# Altium PCB N303-3V1.0.pcbdoc (part 2 of 3)
Units mm, origin at the board's own origin, x right, y up, seen from the top; angles counter-clockwise.
Board outline 100 x 100 mm, 2 copper layers (Top Layer, Bottom Layer); 92 components, 15 nets, 360 pads, 304 vias.
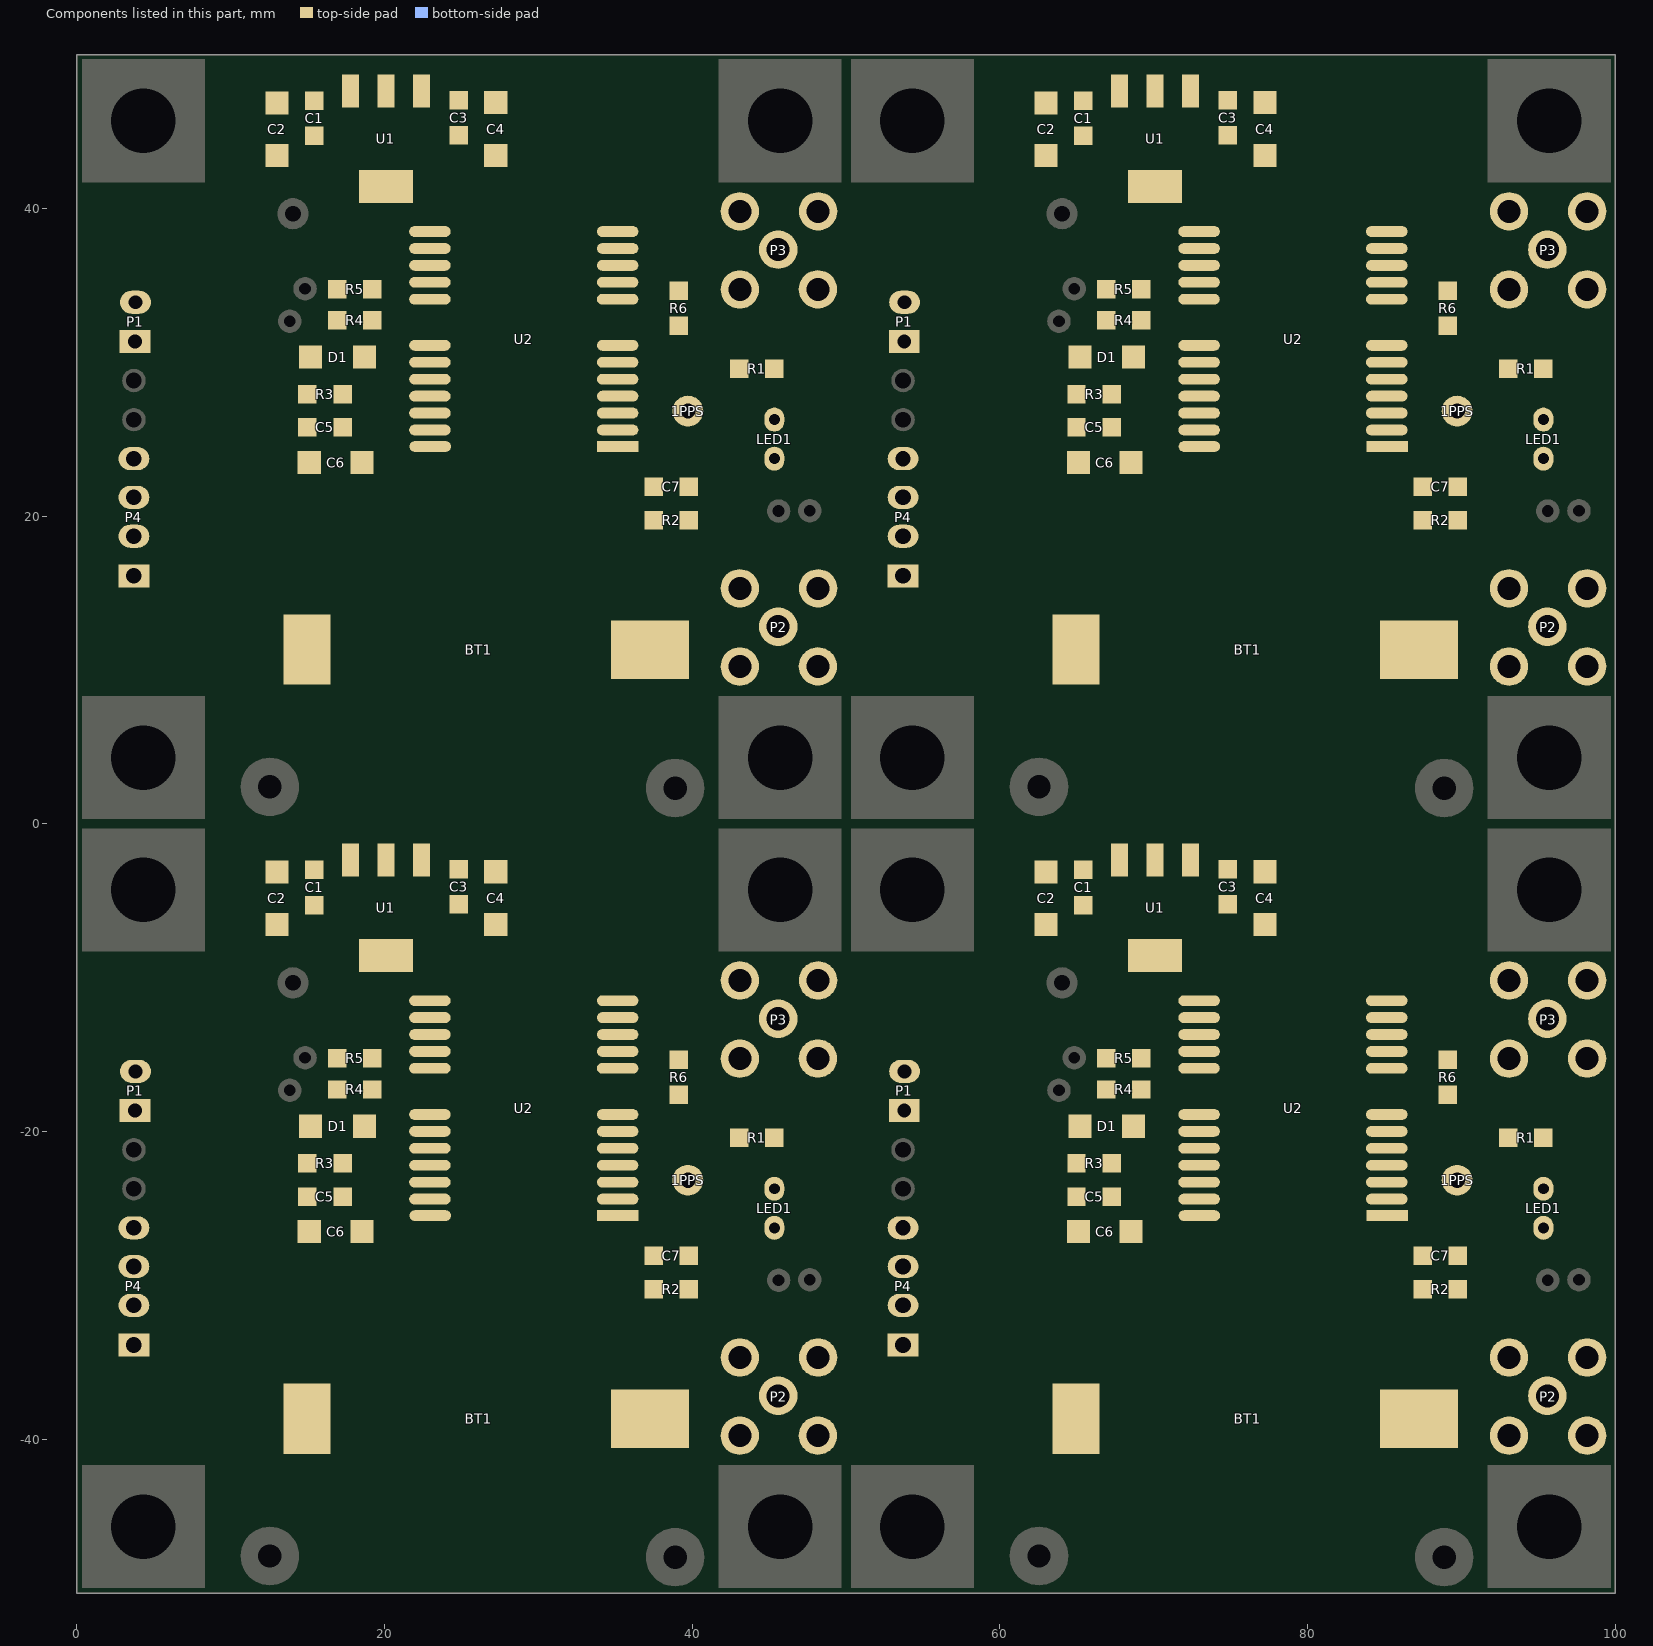
[diagram p2: the components of this part, seen from the top]

## Via types
v1: diameter 0.965, hole 0.457, Top Layer to Bottom Layer, 264 vias
v2: diameter 0.965, hole 0.635, Top Layer to Bottom Layer, 40 vias

## Nets (pads, with @x,y where several pads share a name; then routed paths per layer and width w, separated by ;. In a path a pad name is that pad's centre, name@x,y a point inside that pad or via, vN(x,y) a via of type N, cw(c..) or ccw(c..) an arc to the next point about the centre after c; other vN are vias at no path point) (continued)
copper on no net: | length 5164
  Top Layer w0.305: 14.986,-22.06 16.129,-20.917 17.43,-20.917 18.7,-19.647 ; 17.272,-22.06 18.161,-22.06 ; 19.202,-17.259 20.295,-18.352 20.295,-21.247 21.232,-22.184 22.954,-22.184 ; 19.215,-15.215 20.879,-16.878 20.879,-20.612 21.351,-21.084 22.954,-21.084 ; 22.954,-23.284 21.29,-23.284 ; 64.986,-22.06 66.129,-20.917 67.43,-20.917 68.7,-19.647 ; 64.986,27.94 66.129,29.083 67.43,29.083 68.7,30.353 ; 67.272,-22.06 68.161,-22.06 ; 67.272,27.94 68.161,27.94 ; 69.202,-17.259 70.295,-18.352 70.295,-21.247 71.232,-22.184 72.954,-22.184 ; 69.202,32.741 70.295,31.648 70.295,28.753 71.232,27.816 72.954,27.816 ; 69.215,-15.215 70.879,-16.878 70.879,-20.612 71.351,-21.084 72.954,-21.084 ; 69.215,34.785 70.879,33.122 70.879,29.388 71.351,28.916 72.954,28.916 ; 72.954,-23.284 71.29,-23.284 ; 72.954,26.716 71.29,26.716 ; 18.161,-22.06 19.385,-23.284 21.29,-23.284 ; 18.161,-22.06 20.066,-22.06 21.29,-23.284 ; 68.161,-22.06 69.385,-23.284 71.29,-23.284 ; 68.161,-22.06 70.066,-22.06 71.29,-23.284 ; 68.161,27.94 69.385,26.716 71.29,26.716 ; 68.161,27.94 70.066,27.94 71.29,26.716
  Top Layer w0.508: 5.512,-14.542 5.486,-14.567 ; 7.315,-15.735 7.264,-15.786 5.486,-15.786 ; 8.103,-14.948 8.001,-15.05 5.486,-15.05 ; 13.005,-6.546 13.005,-7.811 ; 15.418,-5.271 15.418,-7.099 ; 18.537,-26.505 20.904,-26.505 26.086,-31.687 38.329,-31.687 ; 21.793,-28.867 21.793,-32.449 ; 21.92,-28.766 25.629,-32.474 ; 22.974,-25.459 25.273,-25.459 ; 26.086,-25.464 26.081,-25.459 25.273,-25.459 ; 33.579,-10.122 33.299,-10.401 ; 35.15,-15.884 37.385,-15.884 39.116,-17.615 ; 35.154,-23.284 39.924,-23.284 40.005,-23.203 42.291,-23.203 45.339,-26.251 45.593,-26.505 45.593,-37.173 ; 35.154,-14.784 38.571,-14.784 39.116,-15.329 ; 35.154,-13.684 36.951,-13.684 ; 35.154,-12.584 45.515,-12.584 45.593,-12.662 ; 35.174,-25.459 36.825,-25.459 37.49,-26.124 37.49,-28.08 37.49,-30.239 ; v1@37.719,-11.544 37.659,-11.484 36.822,-11.484 ; 39.776,-28.08 39.776,-27.927 ; v2(41.529,-26.353) 41.529,-30.366 ; v2(41.554,-20.434) 41.58,-20.409 43.053,-20.409 ; 41.707,-32.677 40.894,-33.49 ; 42.189,-32.652 40.894,-33.947 ; 42.545,-10.401 33.299,-10.401 ; 45.339,-23.711 45.339,-20.409 ; 48.177,-15.246 48.171,-15.252 45.618,-15.252 ; 55.512,-14.542 55.486,-14.567 ; 55.512,35.458 55.486,35.433 ; 57.315,-15.735 57.264,-15.786 55.486,-15.786 ; 57.315,34.265 57.264,34.214 55.486,34.214 ; 58.103,-14.948 58.001,-15.05 55.486,-15.05 ; 58.103,35.052 58.001,34.95 55.486,34.95 ; 63.005,-6.546 63.005,-7.811 ; 63.005,43.454 63.005,42.189 ; 65.418,-5.271 65.418,-7.099 ; 65.418,44.729 65.418,42.901 ; 68.537,-26.505 70.904,-26.505 76.086,-31.687 88.329,-31.687 ; 68.537,23.495 70.904,23.495 76.086,18.313 88.329,18.313 ; 71.793,-28.867 71.793,-32.449 ; 71.793,21.133 71.793,17.551 ; 71.92,-28.766 75.629,-32.474 ; 71.92,21.234 75.629,17.526 ; 72.974,-25.459 75.273,-25.459 ; 72.974,24.541 75.273,24.541 ; 76.086,-25.464 76.081,-25.459 75.273,-25.459 ; 76.086,24.536 76.081,24.541 75.273,24.541 ; 83.579,-10.122 83.299,-10.401 ; 83.579,39.878 83.299,39.599 ; 85.15,-15.884 87.385,-15.884 89.116,-17.615 ; 85.15,34.116 87.385,34.116 89.116,32.385 ; 85.154,-23.284 89.924,-23.284 90.005,-23.203 92.291,-23.203 95.339,-26.251 95.593,-26.505 95.593,-37.173 ; 85.154,-14.784 88.571,-14.784 89.116,-15.329 ; 85.154,-13.684 86.951,-13.684 ; 85.154,-12.584 95.515,-12.584 95.593,-12.662 ; 85.154,26.716 89.924,26.716 90.005,26.797 92.291,26.797 95.339,23.749 95.593,23.495 95.593,12.827 ; 85.154,35.216 88.571,35.216 89.116,34.671 ; 85.154,36.316 86.951,36.316 ; 85.154,37.416 95.515,37.416 95.593,37.338 ; 85.174,-25.459 86.825,-25.459 87.49,-26.124 87.49,-28.08 87.49,-30.239 ; 85.174,24.541 86.825,24.541 87.49,23.876 87.49,21.92 87.49,19.761 ; v1@87.719,-11.544 87.659,-11.484 86.822,-11.484 ; v1@87.719,38.456 87.659,38.516 86.822,38.516 ; 89.776,-28.08 89.776,-27.927 ; 89.776,21.92 89.776,22.073 ; v2(91.529,-26.353) 91.529,-30.366 ; v2(91.529,23.647) 91.529,19.634 ; v2(91.554,-20.434) 91.58,-20.409 93.053,-20.409 ; v2(91.554,29.566) 91.58,29.591 93.053,29.591 ; 91.707,-32.677 90.894,-33.49 ; 91.707,17.323 90.894,16.51 ; 92.189,-32.652 90.894,-33.947 ; 92.189,17.348 90.894,16.053 ; 92.545,-10.401 83.299,-10.401 ; 92.545,39.599 83.299,39.599 ; 95.339,-23.711 95.339,-20.409 ; 95.339,26.289 95.339,29.591 ; 98.177,-15.246 98.171,-15.252 95.618,-15.252 ; 98.177,34.754 98.171,34.748 95.618,34.748 ; 1.651,-9.208 4.267,-9.208 ; 1.651,-9.208 2.134,-9.69 2.134,-14.542 ; 1.651,-9.208 0.648,-9.208 0.597,-9.258 0.597,-40.805 8.712,-40.805 9.296,-41.389 9.296,-48.882 9.804,-49.39 40.792,-49.39 ; 2.134,-16.04 2.174,-16.081 3.809,-16.081 ; 2.134,-16.04 2.134,-14.542 ; 2.134,-16.04 2.134,-26.251 2.134,-35.268 2.21,-35.344 11.938,-35.344 12.421,-35.827 12.421,-40.983 13.183,-41.745 17.094,-41.745 17.628,-41.212 17.628,-37.529 21.793,-33.363 21.793,-32.449 ; 2.134,-14.542 2.27,-14.542 3.809,-16.081 ; 3.809,-16.081 3.972,-16.081 ; 3.809,-16.081 3.809,-9.666 4.216,-9.258 ; 3.972,-16.081 5.486,-14.567 ; 3.972,-16.081 5.486,-16.081 ; 4.216,-9.258 4.267,-9.208 ; 4.216,-9.258 8.458,-9.258 8.509,-9.208 ; 4.267,-9.208 8.509,-9.208 ; 5.486,-16.081 7.351,-16.081 7.887,-15.545 ; 5.486,-16.081 5.486,-15.786 ; 5.486,-15.786 5.486,-15.431 ; 5.486,-15.431 7.772,-15.431 7.887,-15.545 ; 5.486,-15.431 5.486,-15.05 ; 5.486,-15.05 5.486,-14.567 ; 7.887,-15.545 9.906,-13.526 9.906,-2.756 12.065,-0.597 ; 8.509,-9.208 9.144,-8.573 9.144,-1.257 9.804,-0.597 12.065,-0.597 ; 12.065,-0.597 29.083,-0.597 ; 13.005,-7.811 12.573,-7.811 12.344,-8.039 12.344,-12.992 12.827,-13.475 13.691,-13.475 ; 13.005,-7.811 14.707,-7.811 ; 13.005,-7.811 13.005,-12.789 13.691,-13.475 ; 13.691,-13.475 19.177,-13.475 21.167,-11.484 ; 14.707,-7.811 15.418,-7.099 ; 14.707,-7.811 15.443,-7.811 ; 15.418,-7.099 16.104,-7.785 ; 15.418,-7.099 15.418,-7.785 15.443,-7.811 ; 15.443,-7.811 16.078,-7.811 16.104,-7.785 ; 16.104,-7.785 16.104,-9.843 16.561,-10.3 21.234,-10.3 ; 21.167,-11.484 22.954,-11.484 25.273,-11.484 ; 21.167,-11.484 21.167,-10.367 21.234,-10.3 ; 21.234,-10.3 23.876,-10.3 ; 21.793,-32.449 21.819,-32.474 25.629,-32.474 ; 23.876,-10.3 24.003,-10.173 24.003,-8.319 24.257,-8.065 28.575,-8.065 28.981,-7.658 ; 23.876,-10.3 25.273,-10.3 ; 25.273,-25.459 25.273,-29.35 25.349,-29.426 32.842,-29.426 32.944,-29.324 32.944,-11.484 ; 25.273,-25.459 25.273,-11.484 ; 25.273,-11.484 25.273,-10.3 ; 25.273,-11.484 25.527,-11.484 ; 25.273,-10.3 25.502,-10.3 ; 25.502,-10.3 25.502,-11.459 25.527,-11.484 ; 25.502,-10.3 27.737,-10.3 28.981,-9.055 28.981,-7.658 ; 25.527,-11.484 32.766,-11.484 ; 25.629,-32.474 25.654,-32.449 40.894,-32.449 ; 28.981,-7.658 28.981,-0.699 29.083,-0.597 ; 29.083,-0.597 40.386,-0.597 40.869,-1.08 40.869,-8.954 ; 32.766,-11.484 32.766,-10.757 33.122,-10.401 33.299,-10.401 ; 32.766,-11.484 32.944,-11.484 ; 32.944,-11.484 32.944,-10.757 33.299,-10.401 ; 32.944,-11.484 35.154,-11.484 36.822,-11.484 ; 34.036,-38.697 37.236,-38.697 37.262,-38.672 ; 34.036,-38.697 34.036,-40.983 34.366,-41.313 37.313,-41.313 ; 34.036,-38.697 34.036,-36.132 34.29,-35.878 37.262,-35.878 ; 36.822,-11.484 37.16,-11.822 42.977,-11.822 ; 36.951,-13.684 37.289,-13.346 43.002,-13.346 ; 36.951,-13.684 37.076,-13.684 ; 37.076,-13.684 37.414,-14.022 38.568,-14.022 38.583,-14.008 40.183,-14.008 40.462,-14.288 40.462,-18.682 40.843,-19.063 46.355,-19.063 46.965,-19.672 46.965,-31.738 48.183,-32.957 ; 37.076,-13.684 41.377,-13.684 ; 37.262,-38.672 40.818,-38.672 40.894,-38.595 ; 37.262,-38.672 37.262,-41.262 37.313,-41.313 ; 37.262,-38.672 37.262,-35.878 ; 37.262,-35.878 40.894,-35.878 ; 37.313,-41.313 40.792,-41.313 ; 38.329,-31.687 39.776,-30.239 ; 38.329,-31.687 39.802,-31.687 ; 39.776,-30.239 41.402,-30.239 41.529,-30.366 ; 39.776,-30.239 39.776,-31.661 39.802,-31.687 ; 39.776,-27.927 40.538,-27.165 40.538,-25.942 41.119,-25.362 42.113,-25.362 42.596,-25.845 42.596,-30.747 40.894,-32.449 ; 39.776,-27.927 39.776,-27.191 37.313,-24.727 37.313,-24.143 38.405,-24.143 39.065,-24.803 40.538,-24.803 41.224,-24.117 41.935,-24.117 43.993,-26.175 43.993,-26.861 44.272,-27.14 44.272,-33.514 43.103,-34.683 43.103,-37.503 ; 39.802,-31.687 40.208,-31.687 41.529,-30.366 ; 40.792,-49.39 40.894,-49.289 40.894,-41.212 ; 40.792,-49.39 41.084,-49.39 41.097,-49.403 41.183,-49.317 41.183,-41.212 ; 40.792,-49.39 40.792,-41.313 ; 40.792,-41.313 40.894,-41.212 ; 40.792,-41.313 40.792,-41.212 ; 40.792,-41.212 40.894,-41.212 ; 40.792,-41.212 40.894,-41.11 ; 40.869,-8.954 41.034,-8.788 49.403,-8.788 49.403,-17.056 ; 40.869,-8.954 40.869,-9.462 41.579,-10.172 43.103,-10.172 ; 40.894,-41.212 40.894,-41.11 ; 40.894,-41.212 41.183,-41.212 ; 40.894,-41.11 40.894,-40.285 ; 40.894,-41.11 41.307,-40.697 ; 40.894,-40.285 41.307,-40.697 ; 40.894,-40.285 40.894,-38.595 ; 40.894,-38.595 40.894,-37.402 ; 40.894,-37.402 43.001,-37.402 43.103,-37.503 ; 40.894,-37.402 40.894,-35.878 ; 40.894,-35.878 40.894,-33.947 ; 40.894,-33.947 40.894,-33.49 ; 40.894,-33.49 40.894,-32.449 ; 41.183,-41.212 41.472,-41.212 41.51,-41.174 41.783,-41.174 ; 41.307,-40.697 41.783,-41.174 ; 41.307,-40.697 42.241,-39.763 43.103,-39.763 ; 41.377,-13.684 41.25,-13.811 41.25,-16.548 41.783,-17.082 45.72,-17.082 ; 41.377,-13.684 42.996,-13.684 43.002,-13.678 ; 41.783,-41.174 49.263,-41.174 49.403,-41.034 49.403,-17.056 ; 42.977,-11.822 42.977,-10.298 43.103,-10.172 ; 42.977,-11.822 43.867,-11.822 44.856,-10.833 45.695,-10.833 ; 43.002,-13.678 43.002,-15.151 43.103,-15.252 45.618,-15.252 ; 43.002,-13.678 43.002,-13.346 ; 43.002,-13.346 43.791,-13.346 44.865,-14.42 45.669,-14.42 ; 43.103,-39.763 48.171,-39.763 48.177,-39.757 48.183,-39.751 48.183,-34.683 48.183,-32.957 ; 43.103,-39.763 43.103,-37.503 ; 43.103,-10.172 45.669,-10.172 ; 45.618,-15.252 45.669,-15.201 45.669,-14.42 ; 45.618,-15.252 45.618,-16.98 45.72,-17.082 ; 45.669,-14.42 46.35,-14.42 47.371,-13.399 47.371,-12.535 ; 45.669,-10.172 45.695,-10.197 45.695,-10.833 ; 45.669,-10.172 48.183,-10.172 48.183,-12.586 ; 45.695,-10.833 46.533,-10.833 47.371,-11.671 47.371,-12.535 ; 45.72,-17.082 48.183,-17.082 ; 47.371,-12.535 48.132,-12.535 48.183,-12.586 ; 48.183,-32.957 48.183,-17.082 ; 48.183,-17.082 49.378,-17.082 49.403,-17.056 ; 48.183,-17.082 48.183,-12.586 ; 51.651,-9.208 54.267,-9.208 ; 51.651,-9.208 52.134,-9.69 52.134,-14.542 ; 51.651,-9.208 50.648,-9.208 50.597,-9.258 50.597,-40.805 58.712,-40.805 59.296,-41.389 59.296,-48.882 59.804,-49.39 90.792,-49.39 ; 51.651,40.792 54.267,40.792 ; 51.651,40.792 52.134,40.31 52.134,35.458 ; 51.651,40.792 50.648,40.792 50.597,40.742 50.597,9.195 58.712,9.195 59.296,8.611 59.296,1.118 59.804,0.61 90.792,0.61 ; 52.134,-16.04 52.174,-16.081 53.809,-16.081 ; 52.134,-16.04 52.134,-14.542 ; 52.134,-16.04 52.134,-26.251 52.134,-35.268 52.21,-35.344 61.938,-35.344 62.421,-35.827 62.421,-40.983 63.183,-41.745 67.094,-41.745 67.628,-41.212 67.628,-37.529 71.793,-33.363 71.793,-32.449 ; 52.134,-14.542 52.27,-14.542 53.809,-16.081 ; 52.134,33.96 52.174,33.919 53.809,33.919 ; 52.134,33.96 52.134,35.458 ; 52.134,33.96 52.134,23.749 52.134,14.732 52.21,14.656 61.938,14.656 62.421,14.173 62.421,9.017 63.183,8.255 67.094,8.255 67.628,8.788 67.628,12.471 71.793,16.637 71.793,17.551 ; 52.134,35.458 52.27,35.458 53.809,33.919 ; 53.809,-16.081 53.972,-16.081 ; 53.809,-16.081 53.809,-9.666 54.216,-9.258 ; 53.809,33.919 53.972,33.919 ; 53.809,33.919 53.809,40.334 54.216,40.742 ; 53.972,-16.081 55.486,-14.567 ; 53.972,-16.081 55.486,-16.081 ; 53.972,33.919 55.486,35.433 ; 53.972,33.919 55.486,33.919 ; 54.216,-9.258 54.267,-9.208 ; 54.216,-9.258 58.458,-9.258 58.509,-9.208 ; 54.216,40.742 54.267,40.792 ; 54.216,40.742 58.458,40.742 58.509,40.792 ; 54.267,-9.208 58.509,-9.208 ; 54.267,40.792 58.509,40.792 ; 55.486,-16.081 57.351,-16.081 57.887,-15.545 ; 55.486,-16.081 55.486,-15.786 ; 55.486,-15.786 55.486,-15.431 ; 55.486,-15.431 57.772,-15.431 57.887,-15.545 ; 55.486,-15.431 55.486,-15.05 ; 55.486,-15.05 55.486,-14.567 ; 55.486,33.919 57.351,33.919 57.887,34.455 ; 55.486,33.919 55.486,34.214 ; 55.486,34.214 55.486,34.569 ; 55.486,34.569 57.772,34.569 57.887,34.455 ; 55.486,34.569 55.486,34.95 ; 55.486,34.95 55.486,35.433 ; 57.887,-15.545 59.906,-13.526 59.906,-2.756 62.065,-0.597 ; 57.887,34.455 59.906,36.474 59.906,47.244 62.065,49.403 ; 58.509,-9.208 59.144,-8.573 59.144,-1.257 59.804,-0.597 62.065,-0.597 ; 58.509,40.792 59.144,41.427 59.144,48.743 59.804,49.403 62.065,49.403 ; 62.065,-0.597 79.083,-0.597 ; 62.065,49.403 79.083,49.403 ; 63.005,-7.811 62.573,-7.811 62.344,-8.039 62.344,-12.992 62.827,-13.475 63.691,-13.475 ; 63.005,-7.811 64.707,-7.811 ; 63.005,-7.811 63.005,-12.789 63.691,-13.475 ; 63.005,42.189 62.573,42.189 62.344,41.961 62.344,37.008 62.827,36.525 63.691,36.525 ; 63.005,42.189 64.707,42.189 ; 63.005,42.189 63.005,37.211 63.691,36.525 ; 63.691,-13.475 69.177,-13.475 71.167,-11.484 ; 63.691,36.525 69.177,36.525 71.167,38.516 ; 64.707,-7.811 65.418,-7.099 ; 64.707,-7.811 65.443,-7.811 ; 64.707,42.189 65.418,42.901 ; 64.707,42.189 65.443,42.189 ; 65.418,-7.099 66.104,-7.785 ; 65.418,-7.099 65.418,-7.785 65.443,-7.811 ; 65.418,42.901 66.104,42.215 ; 65.418,42.901 65.418,42.215 65.443,42.189 ; 65.443,-7.811 66.078,-7.811 66.104,-7.785 ; 65.443,42.189 66.078,42.189 66.104,42.215 ; 66.104,-7.785 66.104,-9.843 66.561,-10.3 71.234,-10.3 ; 66.104,42.215 66.104,40.157 66.561,39.7 71.234,39.7 ; 71.167,-11.484 72.954,-11.484 75.273,-11.484 ; 71.167,-11.484 71.167,-10.367 71.234,-10.3 ; 71.167,38.516 72.954,38.516 75.273,38.516 ; 71.167,38.516 71.167,39.633 71.234,39.7 ; 71.234,-10.3 73.876,-10.3 ; 71.234,39.7 73.876,39.7 ; 71.793,-32.449 71.819,-32.474 75.629,-32.474 ; 71.793,17.551 71.819,17.526 75.629,17.526 ; 73.876,-10.3 74.003,-10.173 74.003,-8.319 74.257,-8.065 78.575,-8.065 78.981,-7.658 ; 73.876,-10.3 75.273,-10.3 ; 73.876,39.7 74.003,39.827 74.003,41.681 74.257,41.935 78.575,41.935 78.981,42.342 ; 73.876,39.7 75.273,39.7 ; 75.273,-25.459 75.273,-29.35 75.349,-29.426 82.842,-29.426 82.944,-29.324 82.944,-11.484 ; 75.273,-25.459 75.273,-11.484 ; 75.273,-11.484 75.273,-10.3 ; 75.273,-11.484 75.527,-11.484 ; 75.273,-10.3 75.502,-10.3 ; 75.273,24.541 75.273,20.65 75.349,20.574 82.842,20.574 82.944,20.676 82.944,38.516 ; 75.273,24.541 75.273,38.516 ; 75.273,38.516 75.273,39.7 ; 75.273,38.516 75.527,38.516 ; 75.273,39.7 75.502,39.7 ; 75.502,-10.3 75.502,-11.459 75.527,-11.484 ; 75.502,-10.3 77.737,-10.3 78.981,-9.055 78.981,-7.658 ; 75.502,39.7 75.502,38.541 75.527,38.516 ; 75.502,39.7 77.737,39.7 78.981,40.945 78.981,42.342 ; 75.527,-11.484 82.766,-11.484 ; 75.527,38.516 82.766,38.516 ; 75.629,-32.474 75.654,-32.449 90.894,-32.449 ; 75.629,17.526 75.654,17.551 90.894,17.551 ; 78.981,-7.658 78.981,-0.699 79.083,-0.597 ; 78.981,42.342 78.981,49.301 79.083,49.403 ; 79.083,-0.597 90.386,-0.597 90.869,-1.08 90.869,-8.954 ; 79.083,49.403 90.386,49.403 90.869,48.92 90.869,41.046 ; 82.766,-11.484 82.766,-10.757 83.122,-10.401 83.299,-10.401 ; 82.766,-11.484 82.944,-11.484 ; 82.766,38.516 82.766,39.243 83.122,39.599 83.299,39.599 ; 82.766,38.516 82.944,38.516 ; 82.944,-11.484 82.944,-10.757 83.299,-10.401 ; 82.944,-11.484 85.154,-11.484 86.822,-11.484 ; 82.944,38.516 82.944,39.243 83.299,39.599 ; 82.944,38.516 85.154,38.516 86.822,38.516 ; 84.036,-38.697 87.236,-38.697 87.262,-38.672 ; 84.036,-38.697 84.036,-40.983 84.366,-41.313 87.313,-41.313 ; 84.036,-38.697 84.036,-36.132 84.29,-35.878 87.262,-35.878 ; 84.036,11.303 87.236,11.303 87.262,11.328 ; 84.036,11.303 84.036,9.017 84.366,8.687 87.313,8.687 ; 84.036,11.303 84.036,13.868 84.29,14.122 87.262,14.122 ; 86.822,-11.484 87.16,-11.822 92.977,-11.822 ; 86.822,38.516 87.16,38.178 92.977,38.178 ; 86.951,-13.684 87.289,-13.346 93.002,-13.346 ; 86.951,-13.684 87.076,-13.684 ; 86.951,36.316 87.289,36.654 93.002,36.654 ; 86.951,36.316 87.076,36.316 ; 87.076,-13.684 87.414,-14.022 88.568,-14.022 88.583,-14.008 90.183,-14.008 90.462,-14.288 90.462,-18.682 90.843,-19.063 96.355,-19.063 96.965,-19.672 96.965,-31.738 98.183,-32.957 ; 87.076,-13.684 91.377,-13.684 ; 87.076,36.316 87.414,35.978 88.568,35.978 88.583,35.992 90.183,35.992 90.462,35.712 90.462,31.318 90.843,30.937 96.355,30.937 96.965,30.328 96.965,18.262 98.183,17.043 ; 87.076,36.316 91.377,36.316 ; 87.262,-38.672 90.818,-38.672 90.894,-38.595 ; 87.262,-38.672 87.262,-41.262 87.313,-41.313 ; 87.262,-38.672 87.262,-35.878 ; 87.262,-35.878 90.894,-35.878 ; 87.262,11.328 90.818,11.328 90.894,11.405 ; 87.262,11.328 87.262,8.738 87.313,8.687 ; 87.262,11.328 87.262,14.122 ; 87.262,14.122 90.894,14.122 ; 87.313,-41.313 90.792,-41.313 ; 87.313,8.687 90.792,8.687 ; 88.329,-31.687 89.776,-30.239 ; 88.329,-31.687 89.802,-31.687 ; 88.329,18.313 89.776,19.761 ; 88.329,18.313 89.802,18.313 ; 89.776,-30.239 91.402,-30.239 91.529,-30.366 ; 89.776,-30.239 89.776,-31.661 89.802,-31.687 ; 89.776,-27.927 90.538,-27.165 90.538,-25.942 91.119,-25.362 92.113,-25.362 92.596,-25.845 92.596,-30.747 90.894,-32.449 ; 89.776,-27.927 89.776,-27.191 87.313,-24.727 87.313,-24.143 88.405,-24.143 89.065,-24.803 90.538,-24.803 91.224,-24.117 91.935,-24.117 93.993,-26.175 93.993,-26.861 94.272,-27.14 94.272,-33.514 93.103,-34.683 93.103,-37.503 ; 89.776,19.761 91.402,19.761 91.529,19.634 ; 89.776,19.761 89.776,18.339 89.802,18.313 ; 89.776,22.073 90.538,22.835 90.538,24.058 91.119,24.638 92.113,24.638 92.596,24.155 92.596,19.253 90.894,17.551 ; 89.776,22.073 89.776,22.809 87.313,25.273 87.313,25.857 88.405,25.857 89.065,25.197 90.538,25.197 91.224,25.883 91.935,25.883 93.993,23.825 93.993,23.139 94.272,22.86 94.272,16.486 93.103,15.317 93.103,12.497 ; 89.802,-31.687 90.208,-31.687 91.529,-30.366 ; 89.802,18.313 90.208,18.313 91.529,19.634 ; 90.792,-49.39 90.894,-49.289 90.894,-41.212 ; 90.792,-49.39 91.084,-49.39 91.097,-49.403 91.183,-49.317 91.183,-41.212 ; 90.792,-49.39 90.792,-41.313 ; 90.792,-41.313 90.894,-41.212 ; 90.792,-41.313 90.792,-41.212 ; 90.792,-41.212 90.894,-41.212 ; 90.792,-41.212 90.894,-41.11 ; 90.792,0.61 90.894,0.711 90.894,8.788 ; 90.792,0.61 91.084,0.61 91.097,0.597 91.183,0.683 91.183,8.788 ; 90.792,0.61 90.792,8.687 ; 90.792,8.687 90.894,8.788 ; 90.792,8.687 90.792,8.788 ; 90.792,8.788 90.894,8.788 ; 90.792,8.788 90.894,8.89 ; 90.869,-8.954 91.034,-8.788 99.403,-8.788 99.403,-17.056 ; 90.869,-8.954 90.869,-9.462 91.579,-10.172 93.103,-10.172 ; 90.869,41.046 91.034,41.212 99.403,41.212 99.403,32.944 ; 90.869,41.046 90.869,40.538 91.579,39.828 93.103,39.828 ; 90.894,-41.212 90.894,-41.11 ; 90.894,-41.212 91.183,-41.212 ; 90.894,-41.11 90.894,-40.285 ; 90.894,-41.11 91.307,-40.697 ; 90.894,-40.285 91.307,-40.697 ; 90.894,-40.285 90.894,-38.595 ; 90.894,-38.595 90.894,-37.402 ; 90.894,-37.402 93.001,-37.402 93.103,-37.503 ; 90.894,-37.402 90.894,-35.878 ; 90.894,-35.878 90.894,-33.947 ; 90.894,-33.947 90.894,-33.49 ; 90.894,-33.49 90.894,-32.449 ; 90.894,8.788 90.894,8.89 ; 90.894,8.788 91.183,8.788 ; 90.894,8.89 90.894,9.715 ; 90.894,8.89 91.307,9.303 ; 90.894,9.715 91.307,9.303 ; 90.894,9.715 90.894,11.405 ; 90.894,11.405 90.894,12.598 ; 90.894,12.598 93.001,12.598 93.103,12.497 ; 90.894,12.598 90.894,14.122 ; 90.894,14.122 90.894,16.053 ; 90.894,16.053 90.894,16.51 ; 90.894,16.51 90.894,17.551 ; 91.183,-41.212 91.472,-41.212 91.51,-41.174 91.783,-41.174 ; 91.183,8.788 91.472,8.788 91.51,8.826 91.783,8.826 ; 91.307,-40.697 91.783,-41.174 ; 91.307,-40.697 92.241,-39.763 93.103,-39.763 ; 91.307,9.303 91.783,8.826 ; 91.307,9.303 92.241,10.237 93.103,10.237 ; 91.377,-13.684 91.25,-13.811 91.25,-16.548 91.783,-17.082 95.72,-17.082 ; 91.377,-13.684 92.996,-13.684 93.002,-13.678 ; 91.377,36.316 91.25,36.189 91.25,33.452 91.783,32.918 95.72,32.918 ; 91.377,36.316 92.996,36.316 93.002,36.322 ; 91.783,-41.174 99.263,-41.174 99.403,-41.034 99.403,-17.056 ; 91.783,8.826 99.263,8.826 99.403,8.966 99.403,32.944 ; 92.977,-11.822 92.977,-10.298 93.103,-10.172 ; 92.977,-11.822 93.867,-11.822 94.856,-10.833 95.695,-10.833 ; 92.977,38.178 92.977,39.702 93.103,39.828 ; 92.977,38.178 93.867,38.178 94.856,39.167 95.695,39.167 ; 93.002,-13.678 93.002,-15.151 93.103,-15.252 95.618,-15.252 ; 93.002,-13.678 93.002,-13.346 ; 93.002,-13.346 93.791,-13.346 94.865,-14.42 95.669,-14.42 ; 93.002,36.322 93.002,34.849 93.103,34.748 95.618,34.748 ; 93.002,36.322 93.002,36.654 ; 93.002,36.654 93.791,36.654 94.865,35.58 95.669,35.58 ; 93.103,-39.763 98.171,-39.763 98.177,-39.757 98.183,-39.751 98.183,-34.683 98.183,-32.957 ; 93.103,-39.763 93.103,-37.503 ; 93.103,-10.172 95.669,-10.172 ; 93.103,10.237 98.171,10.237 98.177,10.243 98.183,10.249 98.183,15.317 98.183,17.043 ; 93.103,10.237 93.103,12.497 ; 93.103,39.828 95.669,39.828 ; 95.618,-15.252 95.669,-15.201 95.669,-14.42 ; 95.618,-15.252 95.618,-16.98 95.72,-17.082 ; 95.618,34.748 95.669,34.799 95.669,35.58 ; 95.618,34.748 95.618,33.02 95.72,32.918 ; 95.669,-14.42 96.35,-14.42 97.371,-13.399 97.371,-12.535 ; 95.669,-10.172 95.695,-10.197 95.695,-10.833 ; 95.669,-10.172 98.183,-10.172 98.183,-12.586 ; 95.669,35.58 96.35,35.58 97.371,36.601 97.371,37.465 ; 95.669,39.828 95.695,39.803 95.695,39.167 ; 95.669,39.828 98.183,39.828 98.183,37.414 ; 95.695,-10.833 96.533,-10.833 97.371,-11.671 97.371,-12.535 ; 95.695,39.167 96.533,39.167 97.371,38.329 97.371,37.465 ; 95.72,-17.082 98.183,-17.082 ; 95.72,32.918 98.183,32.918 ; 97.371,-12.535 98.132,-12.535 98.183,-12.586 ; 97.371,37.465 98.132,37.465 98.183,37.414 ; 98.183,-32.957 98.183,-17.082 ; 98.183,-17.082 99.378,-17.082 99.403,-17.056 ; 98.183,-17.082 98.183,-12.586 ; 98.183,17.043 98.183,32.918 ; 98.183,32.918 99.378,32.918 99.403,32.944 ; 98.183,32.918 98.183,37.414
  Top Layer w0.635: 3.708,-31.291 9.209,-31.291 11.1,-29.401 11.1,-20.13 ; 3.708,-28.766 8.128,-28.766 9.703,-27.191 9.703,-18.682 ; 12.598,-33.668 12.598,-20.841 13.792,-19.647 15.2,-19.647 ; 13.132,-14.542 13.081,-14.542 9.703,-17.92 9.703,-18.682 ; 13.157,-16.828 13.157,-16.904 11.1,-18.961 11.1,-19.545 ; 13.259,-17.971 11.1,-20.13 ; 13.64,-17.234 15.024,-17.234 ; 14.122,-17.285 13.36,-17.285 11.1,-19.545 ; 14.986,-24.219 14.986,-26.383 15.108,-26.505 ; 15.926,-17.234 15.024,-17.234 ; 16.916,-17.234 15.024,-17.234 ; 16.916,-15.202 14.834,-15.202 13.183,-15.202 9.703,-18.682 ; 17.272,-24.219 17.437,-24.384 18.567,-24.384 ; 18.537,-26.505 18.537,-24.415 18.567,-24.384 ; 22.954,-24.384 18.567,-24.384 ; 53.708,-31.291 59.209,-31.291 61.1,-29.401 61.1,-20.13 ; 53.708,-28.766 58.128,-28.766 59.703,-27.191 59.703,-18.682 ; 53.708,18.709 59.209,18.709 61.1,20.599 61.1,29.87 ; 53.708,21.234 58.128,21.234 59.703,22.809 59.703,31.318 ; 62.598,-33.668 62.598,-20.841 63.792,-19.647 65.2,-19.647 ; 62.598,16.332 62.598,29.159 63.792,30.353 65.2,30.353 ; 63.132,-14.542 63.081,-14.542 59.703,-17.92 59.703,-18.682 ; 63.132,35.458 63.081,35.458 59.703,32.08 59.703,31.318 ; 63.157,-16.828 63.157,-16.904 61.1,-18.961 61.1,-19.545 ; 63.157,33.172 63.157,33.096 61.1,31.039 61.1,30.455 ; 63.259,-17.971 61.1,-20.13 ; 63.259,32.029 61.1,29.87 ; 63.64,-17.234 65.024,-17.234 ; 63.64,32.766 65.024,32.766 ; 64.122,-17.285 63.36,-17.285 61.1,-19.545 ; 64.122,32.715 63.36,32.715 61.1,30.455 ; 64.986,-24.219 64.986,-26.383 65.108,-26.505 ; 64.986,25.781 64.986,23.617 65.108,23.495 ; 65.926,-17.234 65.024,-17.234 ; 65.926,32.766 65.024,32.766 ; 66.916,-17.234 65.024,-17.234 ; 66.916,-15.202 64.834,-15.202 63.183,-15.202 59.703,-18.682 ; 66.916,32.766 65.024,32.766 ; 66.916,34.798 64.834,34.798 63.183,34.798 59.703,31.318 ; 67.272,-24.219 67.437,-24.384 68.567,-24.384 ; 67.272,25.781 67.437,25.616 68.567,25.616 ; 68.537,-26.505 68.537,-24.415 68.567,-24.384 ; 68.537,23.495 68.537,25.585 68.567,25.616 ; 72.954,-24.384 68.567,-24.384 ; 72.954,25.616 68.567,25.616 ; 11.1,-20.13 11.1,-19.545 ; 61.1,-20.13 61.1,-19.545 ; 61.1,29.87 61.1,30.455
  Top Layer w1.016: 22.377,-0.851 22.391,-0.865 22.391,-2.348 26.471,-2.348 27.229,-3.107 27.229,-0.876 27.254,-0.851 ; v2@24.79,-6.536 24.816,-6.51 24.816,-5.23 ; 72.377,-0.851 72.391,-0.865 72.391,-2.348 76.471,-2.348 77.229,-3.107 77.229,-0.876 77.254,-0.851 ; 72.377,49.149 72.391,49.135 72.391,47.652 76.471,47.652 77.229,46.893 77.229,49.124 77.254,49.149 ; v2@74.79,-6.536 74.816,-6.51 74.816,-5.23 ; v2@74.79,43.464 74.816,43.49 74.816,44.77
  Top Layer w1.143: 0.914,-26.251 2.134,-26.251 3.708,-26.251 7.645,-26.251 8.382,-25.514 8.382,-19.393 7.341,-20.434 5.944,-20.434 5.563,-20.815 5.563,-25.997 5.385,-26.175 ; 14.964,-38.659 14.964,-38.262 20.523,-32.703 v2(20.523,-28.258) ; v2(15.088,-28.207) 15.088,-26.525 15.108,-26.505 ; 50.914,-26.251 52.134,-26.251 53.708,-26.251 57.645,-26.251 58.382,-25.514 58.382,-19.393 57.341,-20.434 55.944,-20.434 55.563,-20.815 55.563,-25.997 55.385,-26.175 ; 50.914,23.749 52.134,23.749 53.708,23.749 57.645,23.749 58.382,24.486 58.382,30.607 57.341,29.566 55.944,29.566 55.563,29.185 55.563,24.003 55.385,23.825 ; 64.964,-38.659 64.964,-38.262 70.523,-32.703 v2(70.523,-28.258) ; 64.964,11.341 64.964,11.738 70.523,17.297 v2(70.523,21.742) ; v2(65.088,-28.207) 65.088,-26.525 65.108,-26.505 ; v2(65.088,21.793) 65.088,23.475 65.108,23.495
  Top Layer w1.27: 3.708,-33.871 16.358,-33.871 18.537,-31.692 18.537,-26.505 ; 3.784,-18.631 6.756,-18.631 11.125,-14.262 11.125,-3.391 12.167,-2.35 ; 11.151,-3.366 12.167,-2.35 ; 17.501,-2.35 12.167,-2.35 ; 20.091,-8.548 20.091,-6.515 ; 20.091,-2.348 20.091,-6.515 ; 27.229,-6.536 24.79,-6.536 20.112,-6.536 20.091,-6.515 ; 53.708,-33.871 66.358,-33.871 68.537,-31.692 68.537,-26.505 ; 53.708,16.129 66.358,16.129 68.537,18.308 68.537,23.495 ; 53.784,-18.631 56.756,-18.631 61.125,-14.262 61.125,-3.391 62.167,-2.35 ; 53.784,31.369 56.756,31.369 61.125,35.738 61.125,46.609 62.167,47.65 ; 61.151,-3.366 62.167,-2.35 ; 61.151,46.634 62.167,47.65 ; 67.501,-2.35 62.167,-2.35 ; 67.501,47.65 62.167,47.65 ; 70.091,-8.548 70.091,-6.515 ; 70.091,-2.348 70.091,-6.515 ; 70.091,41.452 70.091,43.485 ; 70.091,47.652 70.091,43.485 ; 77.229,-6.536 74.79,-6.536 70.112,-6.536 70.091,-6.515 ; 77.229,43.464 74.79,43.464 70.112,43.464 70.091,43.485
  Bottom Layer w0.508: v2(41.529,-26.353) 41.529,-20.46 v2(41.554,-20.434) ; 43.078,-18.479 43.103,-18.454 43.103,-17.667 43.103,-17.615 ; v2(91.529,-26.353) 91.529,-20.46 v2(91.554,-20.434) ; v2(91.529,23.647) 91.529,29.54 v2(91.554,29.566) ; 93.078,-18.479 93.103,-18.454 93.103,-17.667 93.103,-17.615 ; 93.078,31.521 93.103,31.546 93.103,32.333 93.103,32.385
  Bottom Layer w1.143: v1(5.41,-9.716) 5.791,-10.097 5.791,-16.015 ; v2(15.088,-28.207) 16.535,-29.655 18.948,-29.655 ; v2(19.685,-22.695) 19.685,-25.54 20.523,-26.378 v2(20.523,-28.258) ; 38.76,-9.69 39.268,-9.182 40.538,-9.182 ; v1(40.945,-18.402) v1@40.869,-18.479 ; 43.103,-39.763 43.078,-39.738 43.078,-32.017 ; 43.103,-34.683 48.183,-34.683 ; v1(43.612,-27.775) 43.078,-27.775 ; v1(55.41,-9.716) 55.791,-10.097 55.791,-16.015 ; v1(55.41,40.284) 55.791,39.903 55.791,33.985 ; v2(65.088,-28.207) 66.535,-29.655 68.948,-29.655 ; v2(65.088,21.793) 66.535,20.345 68.948,20.345 ; v2(69.685,-22.695) 69.685,-25.54 70.523,-26.378 v2(70.523,-28.258) ; v2(69.685,27.305) 69.685,24.46 70.523,23.622 v2(70.523,21.742) ; 88.76,-9.69 89.268,-9.182 90.538,-9.182 ; 88.76,40.31 89.268,40.818 90.538,40.818 ; v1(90.945,-18.402) v1@90.869,-18.479 ; v1(90.945,31.598) v1@90.869,31.521 ; 93.103,-39.763 93.078,-39.738 93.078,-32.017 ; 93.103,-34.683 98.183,-34.683 ; 93.103,10.237 93.078,10.262 93.078,17.983 ; 93.103,15.317 98.183,15.317 ; v1(93.612,-27.775) 93.078,-27.775 ; v1(93.612,22.225) 93.078,22.225 ; v1@0.914,-35.649 v1@1.753,-35.649 ; v1@0.914,-35.649 v1(0.914,-40.399) 1.753,-40.399 ; v1@0.914,-35.649 0.914,-9.69 v1(0.991,-9.614) 2.337,-9.614 ; 1.753,-40.399 8.712,-40.399 v1(9.906,-41.593) v1(9.906,-45.504) v1(9.906,-48.832) 9.906,-48.857 10.135,-49.086 40.792,-49.086 40.792,-41.44 ; 1.753,-40.399 v1@1.753,-35.649 ; v1@1.753,-35.649 10.668,-35.649 13.589,-32.728 13.589,-31.814 ; v1@1.753,-35.649 1.753,-26.2 ; 1.753,-26.2 5.791,-26.2 ; 1.753,-26.2 1.753,-16.015 ; 1.753,-16.015 5.791,-16.015 ; 1.753,-16.015 1.753,-10.198 2.337,-9.614 ; 2.337,-9.614 9.271,-9.614 v1(9.373,-9.716) ; 5.791,-26.2 9.271,-26.2 9.373,-26.099 ; 5.791,-26.2 5.791,-31.852 6.35,-32.41 8.7,-32.41 9.373,-31.737 9.373,-26.099 ; 5.791,-26.2 5.791,-16.015 ; 5.791,-16.015 9.373,-16.015 ; 9.373,-26.099 9.373,-16.015 ; 9.373,-16.015 v1(9.373,-9.716) ; v1(9.373,-9.716) 9.373,-7.861 ; 9.373,-7.861 12.497,-4.737 26.289,-4.737 27.28,-5.728 27.28,-7.43 26.187,-8.522 ; 9.373,-7.861 9.373,-1.372 9.83,-0.914 40.043,-0.914 v1(40.183,-1.054) 40.538,-1.41 40.538,-8.547 ; 13.589,-31.814 13.792,-32.017 22.25,-32.017 ; 13.589,-31.814 13.589,-20.384 16.713,-17.259 ; 16.713,-17.259 16.713,-13.729 16.002,-13.018 v1(13.081,-13.018) 13.081,-9.589 14.148,-8.522 26.187,-8.522 ; 16.713,-17.259 17.069,-17.615 21.996,-17.615 ; 18.948,-29.655 18.948,-27.242 17.882,-26.175 17.882,-21.552 18.593,-20.841 18.618,-20.866 20.396,-20.866 21.463,-21.933 21.463,-24.778 22.225,-25.54 ; 18.948,-29.655 v2(22.225,-29.655) ; 21.996,-17.615 22.225,-17.844 22.225,-18.479 ; 21.996,-17.615 41.834,-17.615 ; v2(22.225,-29.655) 22.225,-25.54 ; v2(22.225,-29.655) 22.225,-31.991 22.25,-32.017 ; 22.225,-25.54 22.225,-18.479 ; 22.225,-18.479 39.218,-18.479 ; 22.25,-32.017 42.443,-32.017 ; 26.187,-8.522 40.513,-8.522 40.538,-8.547 ; 37.871,-21.476 37.871,-24.371 v1(38.049,-24.549) 38.151,-24.549 v1(39.878,-26.276) 39.878,-27.318 39.827,-27.369 40.234,-27.775 43.078,-27.775 ; 37.871,-21.476 38.405,-20.942 ; 37.871,-21.476 37.871,-20.409 ; 37.871,-20.409 38.405,-20.942 ; 37.871,-20.409 37.871,-19.825 ; 37.871,-19.825 39.522,-19.825 ; 37.871,-19.825 38.557,-19.139 ; 38.405,-20.942 39.522,-19.825 ; 38.557,-19.139 39.675,-19.139 39.903,-19.368 ; 38.557,-19.139 39.218,-18.479 ; 39.218,-18.479 39.903,-18.479 ; 39.522,-19.825 39.903,-19.444 ; 39.903,-19.444 39.903,-19.368 ; 39.903,-19.444 39.941,-19.406 ; 39.903,-19.368 39.903,-18.479 ; 39.903,-19.368 39.941,-19.406 ; 39.903,-18.479 v1@40.869,-18.479 ; 39.941,-19.406 v1@40.869,-18.479 ; 40.538,-9.182 40.538,-8.547 ; 40.538,-9.182 40.538,-16.32 40.996,-16.777 ; 40.538,-9.182 41.173,-9.182 ; 40.792,-41.44 40.794,-41.44 41.378,-40.856 49.086,-40.856 48.997,-40.768 v1(48.997,-32.017) ; 40.792,-41.44 40.792,-33.668 42.443,-32.017 ; v1@40.869,-18.479 41.961,-18.479 ; 40.996,-16.777 40.996,-9.36 41.173,-9.182 ; 40.996,-16.777 41.834,-17.615 ; 41.173,-9.182 49.086,-9.182 49.073,-9.195 v1(49.073,-17.615) ; 41.834,-17.615 43.103,-17.615 43.155,-17.615 ; 41.961,-18.479 43.078,-19.596 ; 41.961,-18.479 43.078,-18.479 ; 42.443,-32.017 43.078,-32.017 ; 43.078,-32.017 43.866,-32.017 ; 43.078,-32.017 43.078,-27.775 ; 43.078,-27.775 43.078,-19.596 ; 43.078,-19.596 43.078,-18.479 ; 43.078,-18.479 43.078,-17.691 43.103,-17.667 43.155,-17.615 ; 43.155,-17.615 43.764,-17.615 ; 43.764,-17.615 47.168,-17.615 ; 43.764,-17.615 43.764,-31.915 43.866,-32.017 ; 43.866,-32.017 48.158,-32.017 ; 47.168,-17.615 47.206,-17.653 47.206,-31.064 48.133,-31.991 ; 47.168,-17.615 48.133,-17.615 ; 48.133,-31.991 48.158,-32.017 ; 48.133,-31.991 48.133,-17.615 ; 48.133,-17.615 v1(49.073,-17.615) ; 48.158,-32.017 v1(48.997,-32.017) ; v1(48.997,-32.017) 49.073,-31.941 v1(49.073,-17.615) ; v1@50.914,-35.649 v1@51.753,-35.649 ; v1@50.914,-35.649 v1(50.914,-40.399) 51.753,-40.399 ; v1@50.914,-35.649 50.914,-9.69 v1(50.991,-9.614) 52.337,-9.614 ; v1@50.914,14.351 v1@51.753,14.351 ; v1@50.914,14.351 v1(50.914,9.601) 51.753,9.601 ; v1@50.914,14.351 50.914,40.31 v1(50.991,40.386) 52.337,40.386 ; 51.753,-40.399 58.712,-40.399 v1(59.906,-41.593) v1(59.906,-45.504) v1(59.906,-48.832) 59.906,-48.857 60.135,-49.086 90.792,-49.086 90.792,-41.44 ; 51.753,-40.399 v1@51.753,-35.649 ; v1@51.753,-35.649 60.668,-35.649 63.589,-32.728 63.589,-31.814 ; v1@51.753,-35.649 51.753,-26.2 ; 51.753,-26.2 55.791,-26.2 ; 51.753,-26.2 51.753,-16.015 ; 51.753,-16.015 55.791,-16.015 ; 51.753,-16.015 51.753,-10.198 52.337,-9.614 ; 51.753,9.601 58.712,9.601 v1(59.906,8.407) v1(59.906,4.496) v1(59.906,1.168) 59.906,1.143 60.135,0.914 90.792,0.914 90.792,8.56 ; 51.753,9.601 v1@51.753,14.351 ; v1@51.753,14.351 60.668,14.351 63.589,17.272 63.589,18.186 ; v1@51.753,14.351 51.753,23.8 ; 51.753,23.8 55.791,23.8 ; 51.753,23.8 51.753,33.985 ; 51.753,33.985 55.791,33.985 ; 51.753,33.985 51.753,39.802 52.337,40.386 ; 52.337,-9.614 59.271,-9.614 v1(59.373,-9.716) ; 52.337,40.386 59.271,40.386 v1(59.373,40.284) ; 55.791,-26.2 59.271,-26.2 59.373,-26.099 ; 55.791,-26.2 55.791,-31.852 56.35,-32.41 58.699,-32.41 59.373,-31.737 59.373,-26.099 ; 55.791,-26.2 55.791,-16.015 ; 55.791,-16.015 59.373,-16.015 ; 55.791,23.8 59.271,23.8 59.373,23.901 ; 55.791,23.8 55.791,18.148 56.35,17.59 58.699,17.59 59.373,18.263 59.373,23.901 ; 55.791,23.8 55.791,33.985 ; 55.791,33.985 59.373,33.985 ; 59.373,-26.099 59.373,-16.015 ; 59.373,-16.015 v1(59.373,-9.716) ; v1(59.373,-9.716) 59.373,-7.861 ; 59.373,-7.861 62.497,-4.737 76.289,-4.737 77.28,-5.728 77.28,-7.43 76.187,-8.522 ; 59.373,-7.861 59.373,-1.372 59.83,-0.914 90.043,-0.914 v1(90.183,-1.054) 90.538,-1.41 90.538,-8.547 ; 59.373,23.901 59.373,33.985 ; 59.373,33.985 v1(59.373,40.284) ; v1(59.373,40.284) 59.373,42.139 ; 59.373,42.139 62.497,45.263 76.289,45.263 77.28,44.272 77.28,42.57 76.187,41.478 ; 59.373,42.139 59.373,48.628 59.83,49.086 90.043,49.086 v1(90.183,48.946) 90.538,48.59 90.538,41.453 ; 63.589,-31.814 63.792,-32.017 72.25,-32.017 ; 63.589,-31.814 63.589,-20.384 66.713,-17.259 ; 63.589,18.186 63.792,17.983 72.25,17.983 ; 63.589,18.186 63.589,29.616 66.713,32.741 ; 66.713,-17.259 66.713,-13.729 66.002,-13.018 v1(63.081,-13.018) 63.081,-9.589 64.148,-8.522 76.187,-8.522 ; 66.713,-17.259 67.069,-17.615 71.996,-17.615 ; 66.713,32.741 66.713,36.271 66.002,36.982 v1(63.081,36.982) 63.081,40.411 64.148,41.478 76.187,41.478 ; 66.713,32.741 67.069,32.385 71.996,32.385 ; 68.948,-29.655 68.948,-27.242 67.882,-26.175 67.882,-21.552 68.593,-20.841 68.618,-20.866 70.396,-20.866 71.463,-21.933 71.463,-24.778 72.225,-25.54 ; 68.948,-29.655 v2(72.225,-29.655) ; 68.948,20.345 68.948,22.758 67.882,23.825 67.882,28.448 68.593,29.159 68.618,29.134 70.396,29.134 71.463,28.067 71.463,25.222 72.225,24.46 ; 68.948,20.345 v2(72.225,20.345) ; 71.996,-17.615 72.225,-17.844 72.225,-18.479 ; 71.996,-17.615 91.834,-17.615 ; 71.996,32.385 72.225,32.156 72.225,31.521 ; 71.996,32.385 91.834,32.385 ; v2(72.225,-29.655) 72.225,-25.54 ; v2(72.225,-29.655) 72.225,-31.991 72.25,-32.017 ; 72.225,-25.54 72.225,-18.479 ; 72.225,-18.479 89.218,-18.479 ; v2(72.225,20.345) 72.225,24.46 ; v2(72.225,20.345) 72.225,18.009 72.25,17.983 ; 72.225,24.46 72.225,31.521 ; 72.225,31.521 89.218,31.521 ; 72.25,-32.017 92.443,-32.017 ; 72.25,17.983 92.443,17.983 ; 76.187,-8.522 90.513,-8.522 90.538,-8.547 ; 76.187,41.478 90.513,41.478 90.538,41.453 ; 87.871,-21.476 87.871,-24.371 v1(88.049,-24.549) 88.151,-24.549 v1(89.878,-26.276) 89.878,-27.318 89.827,-27.369 90.234,-27.775 93.078,-27.775 ; 87.871,-21.476 88.405,-20.942 ; 87.871,-21.476 87.871,-20.409 ; 87.871,-20.409 88.405,-20.942 ; 87.871,-20.409 87.871,-19.825 ; 87.871,-19.825 89.522,-19.825 ; 87.871,-19.825 88.557,-19.139 ; 87.871,28.524 87.871,25.629 v1(88.049,25.451) 88.151,25.451 v1(89.878,23.724) 89.878,22.682 89.827,22.631 90.234,22.225 93.078,22.225 ; 87.871,28.524 88.405,29.058 ; 87.871,28.524 87.871,29.591 ; 87.871,29.591 88.405,29.058 ; 87.871,29.591 87.871,30.175 ; 87.871,30.175 89.522,30.175 ; 87.871,30.175 88.557,30.861 ; 88.405,-20.942 89.522,-19.825 ; 88.405,29.058 89.522,30.175 ; 88.557,-19.139 89.675,-19.139 89.903,-19.368 ; 88.557,-19.139 89.218,-18.479 ; 88.557,30.861 89.675,30.861 89.903,30.632 ; 88.557,30.861 89.218,31.521 ; 89.218,-18.479 89.903,-18.479 ; 89.218,31.521 89.903,31.521 ; 89.522,-19.825 89.903,-19.444 ; 89.522,30.175 89.903,30.556 ; 89.903,-19.444 89.903,-19.368 ; 89.903,-19.444 89.941,-19.406 ; 89.903,-19.368 89.903,-18.479 ; 89.903,-19.368 89.941,-19.406 ; 89.903,-18.479 v1@90.869,-18.479 ; 89.903,30.556 89.903,30.632 ; 89.903,30.556 89.941,30.594 ; 89.903,30.632 89.903,31.521 ; 89.903,30.632 89.941,30.594 ; 89.903,31.521 v1@90.869,31.521 ; 89.941,-19.406 v1@90.869,-18.479 ; 89.941,30.594 v1@90.869,31.521 ; 90.538,-9.182 90.538,-8.547 ; 90.538,-9.182 90.538,-16.32 90.996,-16.777 ; 90.538,-9.182 91.173,-9.182 ; 90.538,40.818 90.538,41.453 ; 90.538,40.818 90.538,33.68 90.996,33.223 ; 90.538,40.818 91.173,40.818 ; 90.792,-41.44 90.794,-41.44 91.378,-40.856 99.086,-40.856 98.997,-40.768 v1(98.997,-32.017) ; 90.792,-41.44 90.792,-33.668 92.443,-32.017 ; 90.792,8.56 90.794,8.56 91.378,9.143 99.086,9.143 98.997,9.232 v1(98.997,17.983) ; 90.792,8.56 90.792,16.332 92.443,17.983 ; v1@90.869,-18.479 91.961,-18.479 ; v1@90.869,31.521 91.961,31.521 ; 90.996,-16.777 90.996,-9.36 91.173,-9.182 ; 90.996,-16.777 91.834,-17.615 ; 90.996,33.223 90.996,40.64 91.173,40.818 ; 90.996,33.223 91.834,32.385 ; 91.173,-9.182 99.086,-9.182 99.073,-9.195 v1(99.073,-17.615) ; 91.173,40.818 99.086,40.818 99.073,40.805 v1(99.073,32.385) ; 91.834,-17.615 93.103,-17.615 93.155,-17.615 ; 91.834,32.385 93.103,32.385 93.155,32.385 ; 91.961,-18.479 93.078,-19.596 ; 91.961,-18.479 93.078,-18.479 ; 91.961,31.521 93.078,30.404 ; 91.961,31.521 93.078,31.521 ; 92.443,-32.017 93.078,-32.017 ; 92.443,17.983 93.078,17.983 ; 93.078,-32.017 93.866,-32.017 ; 93.078,-32.017 93.078,-27.775 ; 93.078,-27.775 93.078,-19.596 ; 93.078,-19.596 93.078,-18.479 ; 93.078,-18.479 93.078,-17.691 93.103,-17.667 93.155,-17.615 ; 93.078,17.983 93.866,17.983 ; 93.078,17.983 93.078,22.225 ; 93.078,22.225 93.078,30.404 ; 93.078,30.404 93.078,31.521 ; 93.078,31.521 93.078,32.309 93.103,32.333 93.155,32.385 ; 93.155,-17.615 93.764,-17.615 ; 93.155,32.385 93.764,32.385 ; 93.764,-17.615 97.168,-17.615 ; 93.764,-17.615 93.764,-31.915 93.866,-32.017 ; 93.764,32.385 97.168,32.385 ; 93.764,32.385 93.764,18.085 93.866,17.983 ; 93.866,-32.017 98.158,-32.017 ; 93.866,17.983 98.158,17.983 ; 97.168,-17.615 97.206,-17.653 97.206,-31.064 98.133,-31.991 ; 97.168,-17.615 98.133,-17.615 ; 97.168,32.385 97.206,32.347 97.206,18.936 98.133,18.009 ; 97.168,32.385 98.133,32.385 ; 98.133,-31.991 98.158,-32.017 ; 98.133,-31.991 98.133,-17.615 ; 98.133,-17.615 v1(99.073,-17.615) ; 98.133,18.009 98.158,17.983 ; 98.133,18.009 98.133,32.385 ; 98.133,32.385 v1(99.073,32.385) ; 98.158,-32.017 v1(98.997,-32.017) ; 98.158,17.983 v1(98.997,17.983) ; v1(98.997,-32.017) 99.073,-31.941 v1(99.073,-17.615) ; v1(98.997,17.983) 99.073,18.059 v1(99.073,32.385)
  Bottom Layer w1.27: 3.708,-33.871 9.931,-33.871 11.506,-32.296 11.506,-8.395 13.284,-6.617 v2(25.451,-6.617) ; 43.103,-17.615 43.103,-15.252 ; 43.103,-10.172 43.103,-15.252 ; 48.177,-15.246 48.171,-15.252 43.103,-15.252 ; 53.708,-33.871 59.931,-33.871 61.506,-32.296 61.506,-8.395 63.284,-6.617 v2(75.451,-6.617) ; 53.708,16.129 59.931,16.129 61.506,17.704 61.506,41.605 63.284,43.383 v2(75.451,43.383) ; 93.103,-17.615 93.103,-15.252 ; 93.103,-10.172 93.103,-15.252 ; 93.103,32.385 93.103,34.748 ; 93.103,39.828 93.103,34.748 ; 98.177,-15.246 98.171,-15.252 93.103,-15.252 ; 98.177,34.754 98.171,34.748 93.103,34.748
  other v1: 28.423,-49.009 78.423,-49.009 34.671,-48.882 84.671,-48.882 21.488,-48.832 71.488,-48.832 15.265,-48.73 65.265,-48.73 18.669,-43.548 68.669,-43.548 23.851,-43.523 73.851,-43.523 31.039,-43.345 81.039,-43.345 40.589,-42.405 90.589,-42.405 7.01,-40.373 57.01,-40.373 23.343,-37.706 73.343,-37.706 18.161,-37.605 68.161,-37.605 30.582,-37.224 80.582,-37.224 11.735,-35.928 61.735,-35.928 7.315,-35.878 57.315,-35.878 1.372,-35.776 51.372,-35.776 22.581,-33.414 72.581,-33.414 30.81,-33.338 80.81,-33.338 39.141,-33.312 89.141,-33.312 43.612,-30.188 93.612,-30.188 25.73,-28.918 75.73,-28.918 32.309,-28.867 82.309,-28.867 29.108,-28.689 79.108,-28.689 48.971,-27.089 98.971,-27.089 31.902,-24.803 81.902,-24.803 25.933,-24.727 75.933,-24.727 48.971,-22.568 98.971,-22.568 46.939,-19.342 96.939,-19.342 31.725,-18.936 81.725,-18.936 26.01,-18.885 76.01,-18.885 40.818,-13.83 90.818,-13.83 39.319,-13.729 89.319,-13.729 37.795,-13.703 87.795,-13.703 18.72,-12.992 68.72,-12.992 7.722,-12.84 57.722,-12.84 3.073,-12.662 53.073,-12.662 25.959,-12.459 75.959,-12.459 31.674,-12.433 81.674,-12.433 20.142,-11.595 70.142,-11.595 38.075,-11.417 88.075,-11.417 40.792,-11.392 90.792,-11.392 39.446,-11.367 89.446,-11.367 16.18,-10.935 66.18,-10.935 37.694,-8.7 87.694,-8.7 30.607,-8.649 80.607,-8.649 24.536,-8.573 74.536,-8.573 40.31,-6.21 90.31,-6.21 29.515,-5.347 79.515,-5.347 35.103,-5.093 85.103,-5.093 10.185,-1.308 60.185,-1.308 29.54,-1.08 35.128,-1.08 79.54,-1.08 85.128,-1.08 78.423,0.991 84.671,1.118 71.488,1.168 65.265,1.27 68.669,6.452 73.851,6.477 81.039,6.655 90.589,7.595 57.01,9.627 73.343,12.294 68.161,12.395 80.582,12.776 61.735,14.072 57.315,14.122 51.372,14.224 72.581,16.586 80.81,16.662 89.141,16.688 93.612,19.812 75.73,21.082 82.309,21.133 79.108,21.311 98.971,22.911 81.902,25.197 75.933,25.273 98.971,27.432 96.939,30.658 81.725,31.064 76.01,31.115 90.818,36.17 89.319,36.271 87.795,36.297 68.72,37.008 57.722,37.16 53.073,37.338 75.959,37.541 81.674,37.567 70.142,38.405 88.075,38.583 90.792,38.608 89.446,38.633 66.18,39.065 87.694,41.3 80.607,41.351 74.536,41.427 90.31,43.79 79.515,44.653 85.103,44.907 60.185,48.692 79.54,48.92 85.128,48.92
  other v2: 5.893,-22.568 8.179,-22.568 55.893,-22.568 58.179,-22.568 24.384,-6.617 74.384,-6.617 55.893,27.432 58.179,27.432 74.384,43.383

## Keep-outs
Keep-Out Layer:
  lines w0.178: 0,-50 0,0 0,50 50,50 100,50 100,0 100,-50 50,-50 0,-50